# Altium PCB sumo20-hw.PcbDoc
Units mm, origin at the board's own origin, x right, y up, seen from the top; angles counter-clockwise.
Board outline 100 x 67 mm, 2 copper layers (Top Layer, Bottom Layer); 58 components, 39 nets, 243 pads, 1140 vias.
Unrouted connection lines stored in the file: 27.
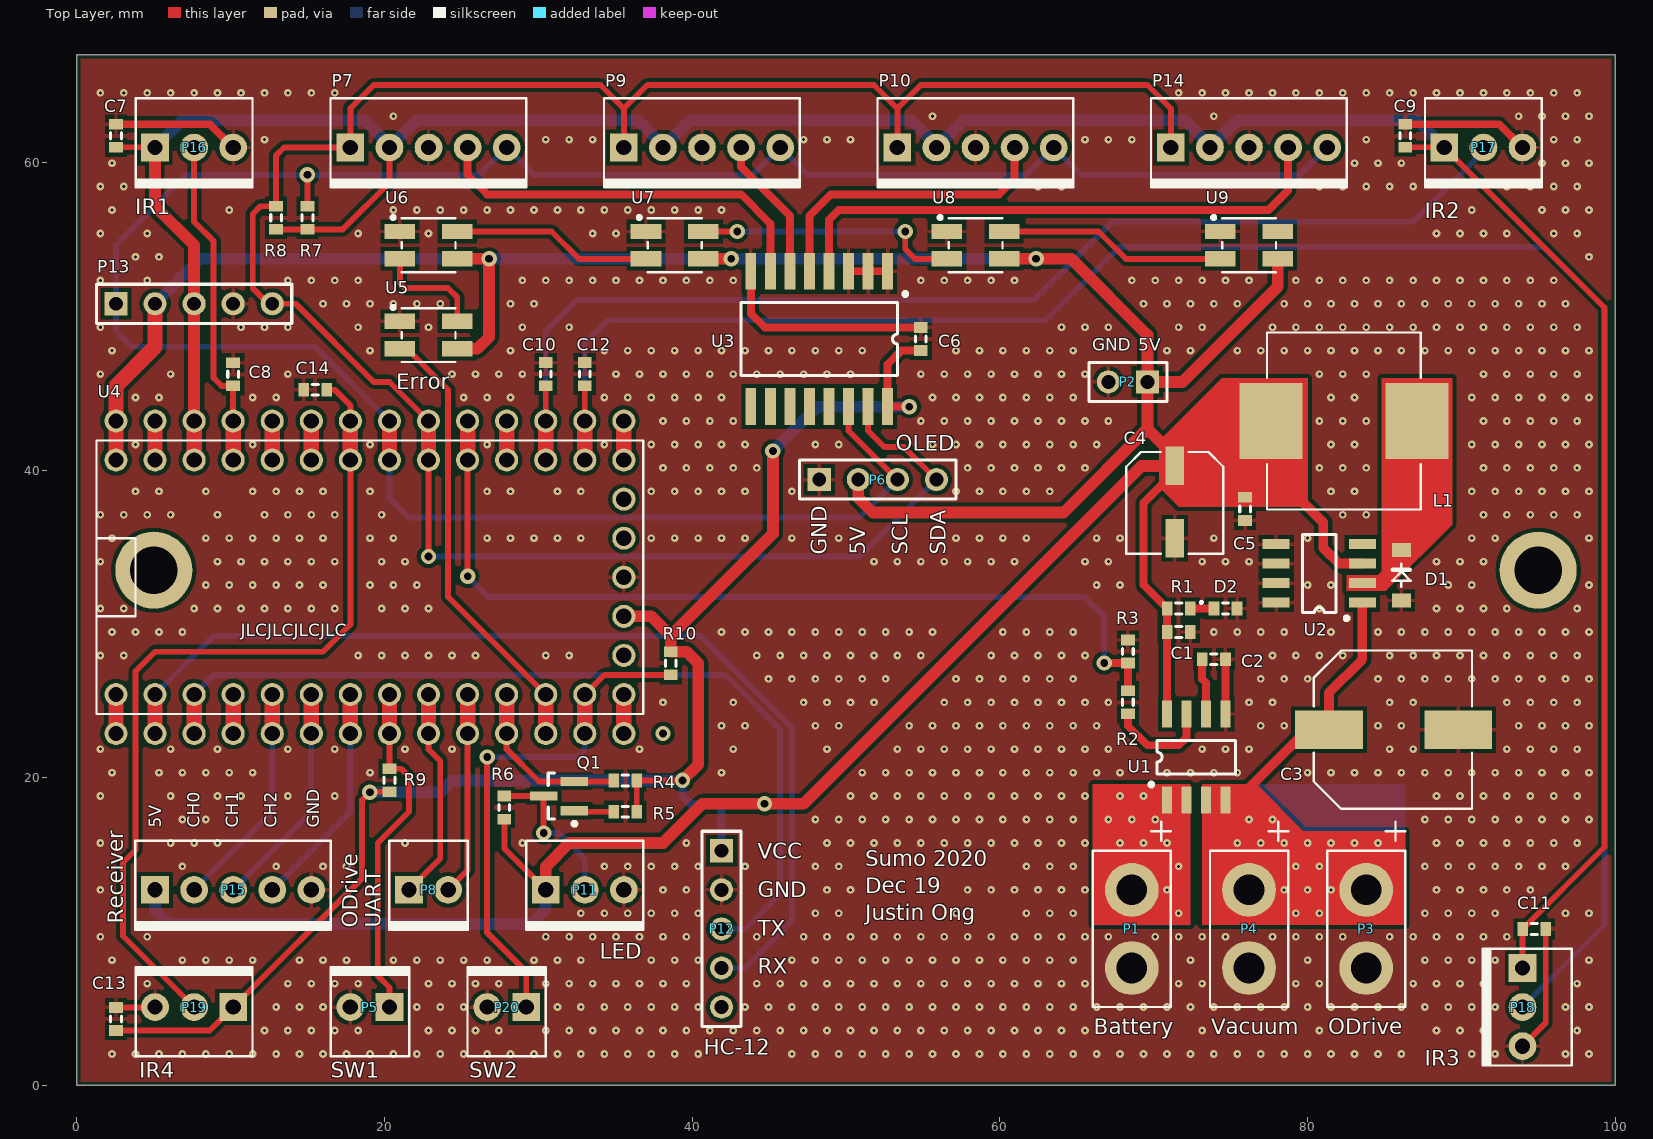
[diagram p0: Top Layer view]
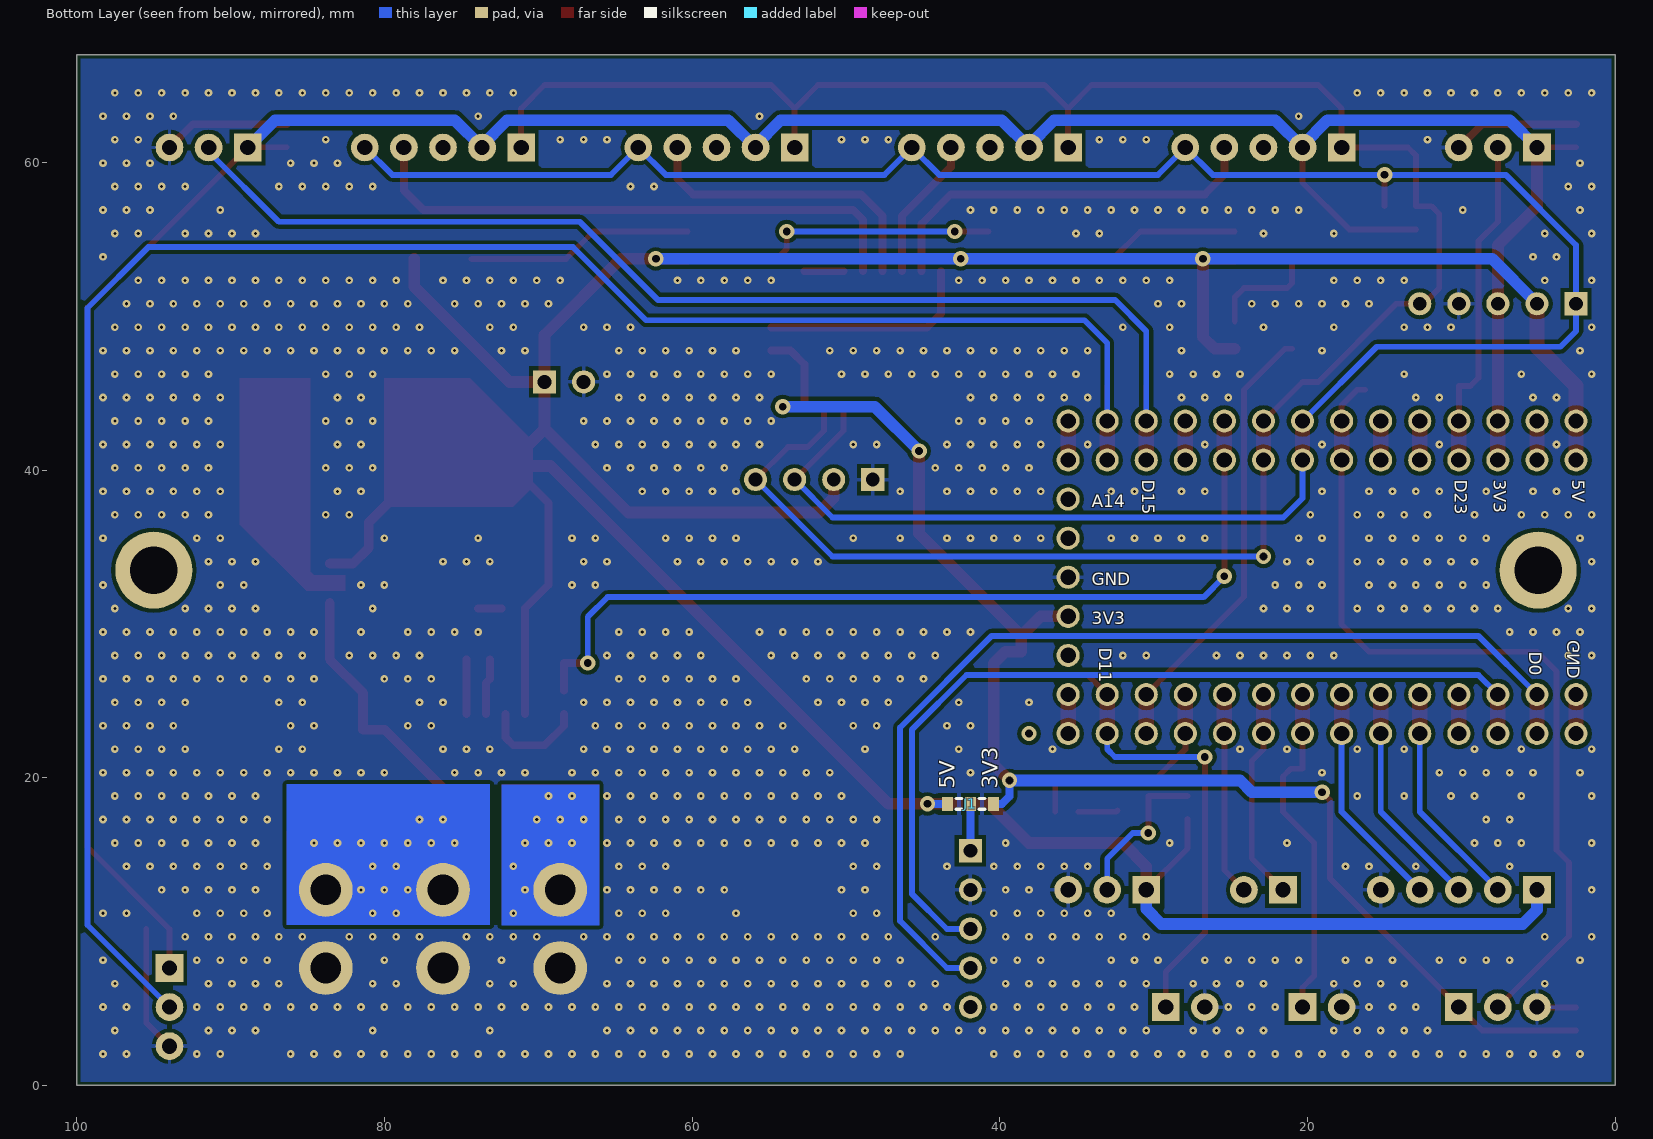
[diagram p1: Bottom Layer view, seen from below]

## Layer stack, top to bottom
Top Solder: solder mask 0.0102, Solder Resist, Dk 3.5
Top Layer: signal copper 0.0356
Dielectric 1: dielectric 0.32, FR-4, Dk 4.8
Bottom Layer: signal copper 0.0356
Bottom Solder: solder mask 0.0102, Solder Resist, Dk 3.5

## Board outline
0,0 100,0 100,67 0,67

## Design rules (kind name [scope] priority, off if disabled: settings)
Clearance "Stitching GND" [IsStitchingVia and InNet('GND') vs (IsVia and (Not IsStitchingVia)) Or IsPad] p1: gap=0.254 ignorepadtopadclearanceinfootprint=FALSE
Clearance [All] p2: gap=0.254 ignorepadtopadclearanceinfootprint=FALSE except(0: Arc-Hole Track-Hole SMDPad-Hole THPad-Hole Via-Hole Fill-Hole Poly-Hole Region-Hole Text-Hole)
PolygonConnect PolygonConnect_1 [IsStitchingVia OR HasFootprint('Wire Terminals')] p1: connectstyle=Direct reliefconductorwidth=0.254 reliefentries=4 polygonreliefangle="90 Angle" airgapwidth=0.254
PolygonConnect [All] p2: connectstyle=Relief reliefconductorwidth=0.254 reliefentries=4 polygonreliefangle="90 Angle" airgapwidth=0.254
RoutingVias [All] p1: holewidth=0.5 width=1 viastyle="Through Hole" minholewidth=0.2 minwidth=0.45 maxholewidth=0.711 maxwidth=1.27
ShortCircuit ShortCircuit_1 [Not InAnyNet vs Not InAnyNet] p1: allowed=TRUE
ShortCircuit [All] p2: allowed=FALSE
SolderMaskExpansion [All] p1: expansion=0.102
Width [All] p1: maxlimit=5 minlimit=0.254 preferedwidth=0.381
29 further rules are at their usual default settings.

## Components (designator, comment, footprint, x,y, rotation, side; value= is the part's Value field where it differs from the comment)
C1 "Cap" J1-0603 71.628,29.484 r180 top value=100nF
C2 "Cap" J1-0603 73.914,27.706 r0 top value=1nF
C3 "Cap Pol1" 10x10.5 85.598,23.134 r0 top value=470uF
C4 "Cap Pol1" 6.3X5.4 71.374,40.279 r270 top value=220uF
C5 "Cap" J1-0603 75.946,37.485 r90 top value=100nF
C6 "Cap" J1-0603 54.864,48.534 r270 top value=100nF
C7 "Cap" J1-0603 2.54,61.742 r90 top value=100nF
C8 "Cap" J1-0603 10.16,46.236 r90 top value=100nF
C9 "Cap" J1-0603 86.36,61.742 r90 top value=100nF
C10 "Cap" J1-0603 30.48,46.248 r90 top value=100nF
C11 "Cap" J1-0603 94.742,10.18 r0 top value=100nF
C12 "Cap" J1-0603 33.02,46.248 r90 top value=100nF
C13 "Cap" J1-0603 2.54,4.326 r90 top value=100nF
C14 "Cap" J1-0603 15.494,45.232 r180 top value=100nF
D1 "DSK34" SOD-123FL 86.106,33.167 r90 top
D2 "LED" "J1-0603 LED" 74.676,31.008 r0 top
J1 "Select" 0603-Jumper 41.91,18.308 r0 bottom
L1 "MS1040-680M" MS1040 82.372,43.2 r180 top value=68uH
P1 "Battery" "Wire Terminals" 68.58,12.72 r270 top
P2 "5V" HDR1X2 69.596,45.74 r180 top
P3 "ODrive" "Wire Terminals" 83.82,12.72 r270 top
P4 "Vacuum" "Wire Terminals" 76.2,12.72 r270 top
P5 "SW1" 2541P02 19.05,5.1 r0 top
P6 "OLED Display" HDR1X4 48.26,39.39 r0 top
P7 "GY-530_A" 2541P05 22.86,60.98 r180 top
P8 "ODrive" 2541P02 22.86,12.72 r180 top
P9 "GY-530_B" 2541P05 40.64,60.98 r180 top
P10 "GY-530_C" 2541P05 58.42,60.98 r180 top
P11 "WS2812" 2541P03 33.02,12.72 r180 top
P12 "HC-12" HDR1X5 41.91,15.26 r270 top
P13 "I2C" HDR1X5 2.54,50.82 r0 top
P14 "GY-530_D" 2541P05 76.2,60.98 r180 top
P15 "Receiver" 2541P05 10.16,12.72 r180 top
P16 "IR_A" 2541P03 7.62,60.98 r180 top
P17 "IR_B" 2541P03 91.44,60.98 r180 top
P18 "IR_C" 2541P03 93.98,5.1 r90 top
P19 "IR_D" 2541P03 7.62,5.1 r0 top
P20 "SW2" 2541P02 27.94,5.1 r0 top
Q1 "S8050" SOT23-3M 31.344,18.816 r180 top
R1 "Res1" J1-0603 71.628,31.008 r180 top value=1k
R2 "Resistor" J1-0603 68.326,24.912 r90 top value=10k
R3 "Resistor" J1-0603 68.326,28.214 r270 top value=20k
R4 "Resistor" J1-0603 35.65,19.832 r0 top value=10k
R5 "Resistor" J1-0603 35.65,17.8 r0 top value=10k
R6 "Resistor" J1-0603 27.788,18.066 r270 top value=10k
R7 "Resistor" J1-0603 14.986,56.408 r90 top value=4k7
R8 "Resistor" J1-0603 12.954,56.408 r90 top value=4k7
R9 "Resistor" J1-0603 20.32,19.844 r270 top value=10k
R10 "Resistor" J1-0603 38.608,27.452 r90 top value=10k
U1 "ACS712" SOP8 70.866,18.55 r90 top
U2 "XL1509" SOP8 83.566,31.389 r180 top
U3 "PCF8574T" "SOT162-1 (SO16)" 48.26,48.534 r270 top
U4 "Teensy 3.2" "Teensy 3.2" 19.05,33.04 r90 top
U5 "WS2812" WS2812B-Mini 22.86,48.788 r180 top
U6 "WS2812" WS2812B-Mini 22.86,54.63 r180 top
U7 "WS2812" WS2812B-Mini 38.862,54.63 r180 top
U8 "WS2812" WS2812B-Mini 58.42,54.63 r180 top
U9 "WS2812" WS2812B-Mini 76.2,54.63 r180 top

## Footprints (in the part's own frame and the unit in brackets; to place one, negate y for a bottom-side part, rotate by r counter-clockwise, add the part's x,y. Pads: shape width x height; smd on the part's side, far side on the other; paste and mask are expansions set on the pad)
6.3X5.4 [mm] "SMD Aluminium Electrolytic Capacitor"
  rect 2.5x1.2 smd: 1(0,0) 2(4.7,0)
  silkscreen extent -0.9,-3.15 5.7,3.15
10x10.5 [mm] "SMD Aluminium Electrolytic Capacitor"
  rect 4.4x2.5 smd: 1(-4.2,0) 2(4.2,0)
  silkscreen extent -5.2,-5.15 5.1,5.15, body extent -5.28,-5.23 5.18,5.23, height 10.2
0603-Jumper [mm] "Selectable Jumper 0603"
  rect 0.7x0.9 smd: 1(-1.5,0) 2(0,0) 3(1.5,0)
  silkscreen extent -0.95,-0.35 0.95,0.35, body extent -1.6,-0.48 1.63,0.48, height 0.9
2541P02 [mm]
  rect 1.8x1.8 hole 1: 1(1.27,0)
  round 1.8 hole 1: 2(-1.27,0)
  silkscreen extent -2.55,-3.2 2.55,2.6
2541P03 [mm]
  rect 1.8x1.8 hole 1: 1(2.54,0)
  round 1.8 hole 1: 2(0,0) 3(-2.54,0)
  silkscreen extent -3.8,-3.2 3.8,2.6
2541P05 [mm]
  rect 1.8x1.8 hole 1: 1(5.08,0)
  round 1.8 hole 1: 2(2.54,0) 3(0,0) 4(-2.54,0) 5(-5.08,0)
  silkscreen extent -6.35,-3.2 6.37,2.6
HDR1X2 [mm] "Connector; Header; 2 Position"
  rect 1.5x1.5 hole 0.9: 1(0,0)
  round 1.5 hole 0.9: 2(2.54,0)
  silkscreen extent -1.27,-1.27 3.81,1.27
HDR1X4 [mm] "Connector; Header; 4 Position"
  rect 1.5x1.5 hole 0.9: 1(0,0)
  round 1.5 hole 0.9: 2(2.54,0) 3(5.08,0) 4(7.62,0)
  silkscreen extent -1.27,-1.27 8.89,1.27
HDR1X5 [mm] "Connector; Header; 5 Position"
  rect 1.5x1.5 hole 0.9: 1(0,0)
  round 1.5 hole 0.9: 2(2.54,0) 3(5.08,0) 4(7.62,0) 5(10.16,0)
  silkscreen extent -1.27,-1.27 11.43,1.27
J1-0603 [mm] "Chip Resistor, Body 1.6x0.8mm, IPC High Density"
  rect 0.7x0.9 smd: 1(-0.75,0) 2(0.75,0)
  silkscreen extent -0.2,-0.35 0.2,0.35, body extent -0.85,-0.48 0.85,0.48, height 0.9
"J1-0603 LED" [mm] "Chip Resistor, Body 1.6x0.8mm, IPC High Density"
  rect 0.7x0.9 smd: 1(-0.75,0) 2(0.75,0)
  silkscreen extent -1.61,-0.35 0.2,0.44, body extent -0.85,-0.48 0.85,0.48, height 0.9
MS1040 [mm] "10 x 11.5 x 4mm Inductor"
  rect 4.1x4.95 smd: 1(-4.75,0) 2(4.75,0)
  silkscreen extent -5,-5.75 5,5.75, body extent -5.08,-5.83 5.08,5.83, height 4
SOD-123FL [mil]
  rect 36x48 smd: 1(-64.5,0) 2(64.5,0)
  silkscreen extent -30,-24 30,24
SOP8 [mm] "ACS712"
  rect 1.75x0.65 smd: 1(0,0) 2(0,-1.27) 3(0,-2.54) 4(0,-3.81) 5(5.6,-3.81) 6(5.6,-2.54) 7(5.6,-1.27) 8(5.6,0)
  silkscreen extent 0.89,-4.44 3.89,1.14
SOT23-3M [mm] "SOT23, 3-Leads, Body 2.9x1.3mm, Pitch 0.95mm, Lead Span 2.5mm, IPC Low Density"
  rect 1.8x0.6 smd: 1(-1,0.95) 2(-1,-0.95) 3(1,0)
  silkscreen extent -1.13,-1.5 0.7,1.92, body extent -0.7,-1.5 0.7,1.5, height 1.1
"SOT162-1 (SO16)" [mm]
  rect 2.4x0.7 smd: 1(-4.4,4.445) 2(-4.4,3.175) 3(-4.4,1.905) 4(-4.4,0.635) 5(-4.4,-0.635) 6(-4.4,-1.905) 7(-4.4,-3.175) 8(-4.4,-4.445) 9(4.4,-4.445) 10(4.4,-3.175) 11(4.4,-1.905) 12(4.4,-0.635) 13(4.4,0.635) 14(4.4,1.905) 15(4.4,3.175) 16(4.4,4.445)
  silkscreen extent -3.05,-5.08 2.37,5.71
"Teensy 3.2" [mm]
  round 1.5 hole 1: 1(-10.16,16.51) 1(-7.62,16.51) 2(-10.16,13.97) 2(-7.62,13.97) 3(-10.16,11.43) 3(-7.62,11.43) 4(-10.16,8.89) 4(-7.62,8.89) 5(-10.16,6.35) 5(-7.62,6.35) 6(-10.16,3.81) 6(-7.62,3.81) 7(-10.16,1.27) 7(-7.62,1.27) 8(-10.16,-1.27) 8(-7.62,-1.27) 9(-10.16,-3.81) 9(-7.62,-3.81) 10(-10.16,-6.35) 10(-7.62,-6.35) 11(-10.16,-8.89) 11(-7.62,-8.89) 12(-10.16,-11.43) 12(-7.62,-11.43) 13(-10.16,-13.97) 13(-7.62,-13.97) 14(-10.16,-16.51) 14(-7.62,-16.51) 15(-5.08,-16.51) 16(-2.54,-16.51) 17(0,-16.51) 18(2.54,-16.51) 19(5.08,-16.51) 20(7.62,-16.51) 20(10.16,-16.51) 21(7.62,-13.97) 21(10.16,-13.97) 22(7.62,-11.43) 22(10.16,-11.43) 23(7.62,-8.89) 23(10.16,-8.89) 24(7.62,-6.35) 24(10.16,-6.35) 25(7.62,-3.81) 25(10.16,-3.81) 26(7.62,-1.27) 26(10.16,-1.27) 27(7.62,1.27) 27(10.16,1.27) 28(7.62,3.81) 28(10.16,3.81) 29(7.62,6.35) 29(10.16,6.35) 30(7.62,8.89) 30(10.16,8.89) 31(7.62,11.43) 31(10.16,11.43) 32(7.62,13.97) 32(10.16,13.97) 33(7.62,16.51) 33(10.16,16.51)
  Top Layer lines w1: -10.16,16.51 -7.62,16.51 ; 7.62,16.51 10.16,16.51 ; -10.16,13.97 -7.62,13.97 ; 7.62,13.97 10.16,13.97 ; -10.16,11.43 -7.62,11.43 ; 7.62,11.43 9.906,11.43 10.16,11.43 ; -10.16,8.89 -7.62,8.89 ; 7.62,8.89 10.16,8.89 ; -10.16,6.35 -7.62,6.35 ; 7.62,6.35 10.16,6.35 ; -10.16,3.81 -7.62,3.81 ; 7.62,3.81 10.16,3.81 ; -10.16,1.27 -7.62,1.27 ; 7.62,1.27 10.16,1.27 ; -10.16,-1.27 -7.62,-1.27 ; 7.62,-1.27 10.16,-1.27 ; -10.16,-3.81 -7.62,-3.81 ; 7.62,-3.81 10.16,-3.81 ; -10.16,-6.35 -7.62,-6.35 ; 7.62,-6.35 10.16,-6.35 ; -10.16,-8.89 -7.62,-8.89 ; 7.62,-8.89 10.16,-8.89 ; -10.16,-11.43 -7.62,-11.43 ; 7.62,-11.43 10.16,-11.43 ; -10.16,-13.97 -7.62,-13.97 ; 7.62,-13.97 10.16,-13.97 ; -10.16,-16.51 -7.62,-16.51 ; 7.62,-16.51 10.16,-16.51
  silkscreen extent -8.89,-17.78 8.89,17.78
"Wire Terminals" [mm]
  round 3.5 hole 2: 1(0,0) 2(5.08,0)
  silkscreen extent -4.44,-2.54 7.62,2.54
WS2812B-Mini [mm] "3535 Mini Variant"
  rect 2x1 smd: 1(-1.865,0.89) 2(-1.865,-0.89) 3(1.865,-0.89) 4(1.865,0.89)
  silkscreen extent -1.75,-1.9 2.4,1.75

## Part data
C1 C5 C6 C7 C8 C9 C10 C11 C12 C13 C14: "Capacitor", LCSC=C153795, LatestRevisionDate=17-Jul-2002, LatestRevisionNote="Re-released for DXP Platform.", PackageDescription="Radial Cap, Thru-Hole; 2 Leads; 0.3 in Pin Spacing", PackageReference=RAD-0.3, Published=8-Jun-2000, Publisher="Altium Limited"
C2: "Capacitor"
C3: "Polarized Capacitor (Radial)", LCSC=C280413, LatestRevisionDate=17-Jul-2002, LatestRevisionNote="Re-released for DXP Platform.", PackageDescription="Polarized Capacitor (Radial); 2 Leads", PackageReference=RB7.6-15, Published=8-Jun-2000, Publisher="Altium Limited"
C4: "Polarized Capacitor (Radial)", LCSC=C131157, LatestRevisionDate=17-Jul-2002, LatestRevisionNote="Re-released for DXP Platform.", PackageDescription="Polarized Capacitor (Radial); 2 Leads", PackageReference=RB7.6-15, Published=8-Jun-2000, Publisher="Altium Limited"
D1: library part "D Schottky", "Schottky Diode", LCSC=C41029, Code_JEDEC=DO-214-AA, LatestRevisionDate=17-Jul-2002, LatestRevisionNote="Re-released for DXP Platform.", PackageDescription="DO-214-AA/SMB; 2 C-Bend Leads; Body 5.3 x 3.6 mm, inc. leads (LxW)", PackageReference=SMB, Published=8-Jun-2000, Publisher="Altium Limited"
D2: LCSC=C205450, LatestRevisionDate=17-Jul-2002, LatestRevisionNote="Re-released for DXP Platform.", PackageDescription="SM LED; 2 Flat Leads", PackageReference=3.2X1.6X1.1, PackageVersion=Feb-2002, Published=8-Jun-2000, Publisher="Altium Limited"
J1: library part "Select Jumper"
L1: library part Inductor, "Inductor", LCSC=C380058, Code_IEC=1005, Code_JEITA=0402, LatestRevisionDate=29-May-2009, LatestRevisionNote="IPC-7351 Footprint Added.", PackageDescription="Chip Inductor", PackageReference=0402-A, Published=8-Jun-2000, Publisher="Altium Limited"
P1 P2 P3 P4 P5 P8 P20: library part "Header 2", "Header, 2-Pin", LatestRevisionDate=17-Jul-2002, LatestRevisionNote="Re-released for DXP Platform.", Publisher="Altium Limited"
P6: library part "Header 4", "Header, 4-Pin", LatestRevisionDate=17-Jul-2002, LatestRevisionNote="Re-released for DXP Platform.", Publisher="Altium Limited"
P7 P9 P10 P12 P13 P14 P15: library part "Header 5", "Header, 5-Pin", LatestRevisionDate=17-Jul-2002, LatestRevisionNote="Re-released for DXP Platform.", Publisher="Altium Limited"
P11 P16 P17 P18 P19: library part "Header 3", "Header, 3-Pin", LatestRevisionDate=17-Jul-2002, LatestRevisionNote="Re-released for DXP Platform.", Publisher="Altium Limited"
Q1: "NPN General Purpose Amplifier", DatasheetVersion=1997, LatestRevisionDate=15-Jan-2003, LatestRevisionNote="PCB Footprint 'BCY-W3/D4.7' replaced", PackageDescription="TO, Flat Index; 3 In-Line, Axial Leads; Body Dia. 4.5mm; Leads 0.51 x 0.48 mm (max)", PackageReference=TO-92A, PackageVersion=Sep-1998, Published=8-Jun-2000, Publisher="Altium Limited"
R1: "Resistor", LatestRevisionDate=17-Jul-2002, LatestRevisionNote="Re-released for DXP Platform.", PackageDescription="Axial Device, Thru-Hole; 2 Leads; 0.3 in Pin Spacing", PackageReference=AXIAL-0.3, Published=8-Jun-2000, Publisher="Altium Limited"
U1: "Fully Integrated, Hall Effect-Based Linear Current Sensor with 2.1 kVRMS Voltage Isolation and a Low-Resistance Current Conductor"
U2: LCSC=C61063
U3: "Remote 8-Bit I/O Expander for I2C Bus"
R2 R3 R4 R5 R6 R7 R8 R9 R10: LatestRevisionDate=17-Jul-2002, LatestRevisionNote="Re-released for DXP Platform.", PackageDescription="Axial Device, Thru-Hole; 2 Leads; 0.3 in Pin Spacing", PackageReference=AXIAL-0.3, Published=8-Jun-2000, Publisher="Altium Limited"

## Free pads (board coordinates)
  round 5 hole 3.1: 1(5,33.5) 2(95,33.5)

## Via types
v1: diameter 0.5, hole 0.2, Top Layer to Bottom Layer, tented both sides, 1123 vias
v2: diameter 1, hole 0.5, Top Layer to Bottom Layer, tented both sides, 17 vias

## Nets (pads, with @x,y where several pads share a name; then routed paths per layer and width w, separated by ;. In a path a pad name is that pad's centre, name@x,y a point inside that pad or via, vN(x,y) a via of type N, cw(c..) or ccw(c..) an arc to the next point about the centre after c; other vN are vias at no path point)
3V3: C6.2 C7.1 C9.1 C11.1 C13.1 J1.1 P7.2 P9.2 P10.2 P13.3 P14.2 P16.1 P17.1 P18.1 P19.1 R4.2 R5.2 R7.1 R8.1 R9.2 R10.2 U3.16 U4.16 U4.31 | length 287.6
  Top Layer w0.381: C13.1 8.636,3.576 P19.1 18.542,13.482 18.542,18.562 v2(19.05,19.07) 19.074,19.094 R9.2 ; C7.1 5.068,60.992 P16.1 ; U4.31@7.62,42.946 U4.31@7.62,43.2 ; R8.1 R7.1 17.284,55.658 20.32,58.694 P7.2 ; R5.2 R4.2 v2(39.37,19.832) ; C9.1 88.888,60.992 P17.1 99.314,50.566 99.314,15.502 C11.1 93.98,10.168 P18.1
  Top Layer w0.508: v2(54.116,44.134) U3.16 52.705,46.883 53.606,47.784 C6.2
  Top Layer w0.762: P16.1 5.08,57.17 7.62,54.63 P13.3 ; U4.31@7.62,43.2 P13.3@7.62,50.566 ; U4.16 37.338,30.5 38.608,29.23 ; v2(39.37,19.832) 40.386,20.848 40.386,27.452 39.636,28.202 R10.2 38.608,29.23 ; v2(45.25,41.25) 45.25,35.872 38.608,29.23
  Bottom Layer w0.508: v2(39.37,19.832) 39.37,18.796 39.858,18.308 J1.1
  Bottom Layer w0.762: P16.1 6.858,62.758 18.7,62.758 20.32,61.138 P7.2 22.098,62.758 36.48,62.758 38.1,61.138 P9.2 39.878,62.758 54.26,62.758 55.88,61.138 P10.2 57.658,62.758 72.04,62.758 73.66,61.138 P14.2 75.438,62.758 87.122,62.758 P17.1 ; v2(19.05,19.07) 23.622,19.07 24.384,19.832 v2(39.37,19.832) ; v2(45.25,41.25) 48.134,44.134 v2(54.116,44.134)
5V: C1.2 C4.1 C5.2 J1.3 L1.2 P2.1 P6.2 P11.1 P13.2 P15.1 R1.2 R6.2 U1.8 U2.3 U4.33 U5.1 U6.1 U7.1 U8.1 U9.1 | length 253.3
  Top Layer w0.381: R6.2 27.788,15.412 P11.1
  Top Layer w0.508: 70.612,39.136 69.342,37.866 69.342,32.544 70.866,31.02 U1.8
  Top Layer w0.635: L1.2@77.546,43.073 77.546,40.076 81.026,36.596 81.026,34.945 82.042,33.929 U2.3
  Top Layer w0.762: U5.1 26.034,47.898 26.796,48.66 v2(26.796,53.74) U6.1 ; P11.1 30.48,14.23 32.018,15.768 38.12,15.768 40.66,18.308 v2(44.704,18.308) 47.244,18.308 69.215,40.279 C4.1 ; U7.1 v2(42.546,53.74) ; P6.2 50.8,38.2 51.75,37.25 64.154,37.25 69.596,42.692 ; U8.1 v2(62.358,53.74) 64.644,53.74 69.596,48.788 P2.1 ; C4.1@71.374,39.136 C4.1 ; U9.1 78.065,51.923 71.882,45.74 P2.1 ; 69.596,42.692 71.374,40.914 C4.1 ; 69.596,42.692 P2.1
  Top Layer w1: U4.33@2.54,43.2 2.54,45.486 5.08,48.026 P13.2
  Bottom Layer w0.508: J1.3 v2(44.704,18.308)
  Bottom Layer w0.762: P15.1 5.08,11.42 6,10.5 29.5,10.5 30.48,11.48 P11.1 ; P13.2 8,53.74 v2(26.796,53.74) v2(42.546,53.74) v2(62.358,53.74)
GND: C1.1 C2.2 C3.2 C4.2 C5.1 C6.1 C7.2 C8.2 C9.2 C10.2 C11.2 C12.2 C13.2 C14.2 D1.1 D2.2 P1.2 P2.2 P3.2 P4.2 P5.2 P6.1 P7.3 P9.3 P10.3 P11.3 P12.2 P13.4 P14.3 P15.5 P16.3 P17.3 P18.3 P19.3 P20.2 R3.1 U1.5 U2.5 U2.6 U2.7 U2.8 U3.1 U3.2 U3.3 U3.8 U4.17 U5.3 U6.3 U7.3 U8.3 U9.3 | length 47.6
  Top Layer w0.381: C13.2 5.056,5.076 P19.3 ; P18.3 95.492,4.072 C11.2
  Top Layer w0.508: C7.2 8.648,62.492 P16.3 ; U3.8 43.815,50.185 44.716,49.284 C6.1 ; U3.3 U3.2 U3.1 ; C2.2 74.664,24.162 U1.5 ; C9.2 92.468,62.492 P17.3
  other v1: 2.286,2.052 3.81,2.052 5.334,2.052 6.858,2.052 8.382,2.052 9.906,2.052 11.43,2.052 12.954,2.052 14.478,2.052 16.002,2.052 17.526,2.052 19.05,2.052 20.574,2.052 22.098,2.052 23.622,2.052 25.146,2.052 26.67,2.052 28.194,2.052 29.718,2.052 31.242,2.052 32.766,2.052 34.29,2.052 35.814,2.052 37.338,2.052 38.862,2.052 40.386,2.052 46.482,2.052 48.006,2.052 49.53,2.052 51.054,2.052 52.578,2.052 54.102,2.052 55.626,2.052 57.15,2.052 58.674,2.052 60.198,2.052 61.722,2.052 63.246,2.052 64.77,2.052 66.294,2.052 67.818,2.052 69.342,2.052 70.866,2.052 72.39,2.052 73.914,2.052 75.438,2.052 76.962,2.052 78.486,2.052 80.01,2.052 81.534,2.052 83.058,2.052 84.582,2.052 86.106,2.052 90.678,2.052 92.202,2.052 96.774,2.052 98.298,2.052 12.192,3.576 13.716,3.576 15.24,3.576 16.764,3.576 18.288,3.576 22.86,3.576 24.384,3.576 25.908,3.576 27.432,3.576 30.48,3.576 32.004,3.576 33.528,3.576 35.052,3.576 36.576,3.576 38.1,3.576 39.624,3.576 41.148,3.576 42.672,3.576 44.196,3.576 45.72,3.576 47.244,3.576 48.768,3.576 50.292,3.576 51.816,3.576 53.34,3.576 54.864,3.576 56.388,3.576 57.912,3.576 59.436,3.576 60.96,3.576 62.484,3.576 64.008,3.576 65.532,3.576 73.152,3.576 80.772,3.576 88.392,3.576 89.916,3.576 91.44,3.576 97.536,3.576 12.954,5.1 14.478,5.1 16.002,5.1 22.098,5.1 23.622,5.1 25.146,5.1 31.242,5.1 32.766,5.1 34.29,5.1 35.814,5.1 37.338,5.1 38.862,5.1 40.386,5.1 43.434,5.1 44.958,5.1 46.482,5.1 48.006,5.1 49.53,5.1 51.054,5.1 52.578,5.1 54.102,5.1 55.626,5.1 57.15,5.1 58.674,5.1 60.198,5.1 61.722,5.1 63.246,5.1 64.77,5.1 66.294,5.1 67.818,5.1 69.342,5.1 70.866,5.1 72.39,5.1 73.914,5.1 75.438,5.1 76.962,5.1 78.486,5.1 80.01,5.1 81.534,5.1 83.058,5.1 84.582,5.1 86.106,5.1 87.63,5.1 89.154,5.1 90.678,5.1 92.202,5.1 96.774,5.1 98.298,5.1 4.572,6.624 13.716,6.624 15.24,6.624 16.764,6.624 18.288,6.624 22.86,6.624 24.384,6.624 25.908,6.624 27.432,6.624 30.48,6.624 32.004,6.624 33.528,6.624 35.052,6.624 36.576,6.624 38.1,6.624 39.624,6.624 44.196,6.624 45.72,6.624 47.244,6.624 48.768,6.624 50.292,6.624 51.816,6.624 53.34,6.624 54.864,6.624 56.388,6.624 57.912,6.624 59.436,6.624 60.96,6.624 62.484,6.624 64.008,6.624 65.532,6.624 71.628,6.624 73.152,6.624 79.248,6.624 80.772,6.624 86.868,6.624 88.392,6.624 89.916,6.624 91.44,6.624 97.536,6.624 2.286,8.148 6.858,8.148 8.382,8.148 9.906,8.148 11.43,8.148 14.478,8.148 16.002,8.148 17.526,8.148 20.574,8.148 22.098,8.148 23.622,8.148 25.146,8.148 26.67,8.148 29.718,8.148 31.242,8.148 32.766,8.148 37.338,8.148 38.862,8.148 40.386,8.148 46.482,8.148 48.006,8.148 49.53,8.148 51.054,8.148 52.578,8.148 54.102,8.148 55.626,8.148 57.15,8.148 58.674,8.148 60.198,8.148 61.722,8.148 63.246,8.148 64.77,8.148 72.39,8.148 80.01,8.148 87.63,8.148 89.154,8.148 90.678,8.148 92.202,8.148 98.298,8.148 1.524,9.672 4.572,9.672 30.48,9.672 32.004,9.672 33.528,9.672 35.052,9.672 36.576,9.672 38.1,9.672 39.624,9.672 44.196,9.672 47.244,9.672 48.768,9.672 50.292,9.672 51.816,9.672 53.34,9.672 54.864,9.672 56.388,9.672 57.912,9.672 59.436,9.672 60.96,9.672 62.484,9.672 64.008,9.672 65.532,9.672 67.056,9.672 70.104,9.672 71.628,9.672 73.152,9.672 74.676,9.672 77.724,9.672 79.248,9.672 80.772,9.672 82.296,9.672 85.344,9.672 86.868,9.672 88.392,9.672 89.916,9.672 91.44,9.672 92.964,9.672 32.766,11.196 34.29,11.196 35.814,11.196 37.338,11.196 38.862,11.196 40.386,11.196 48.006,11.196 49.53,11.196 57.15,11.196 61.722,11.196 63.246,11.196 64.77,11.196 87.63,11.196 89.154,11.196 90.678,11.196 92.202,11.196 96.774,11.196 98.298,11.196 1.524,12.72 38.1,12.72 39.624,12.72 48.768,12.72 50.292,12.72 57.912,12.72 59.436,12.72 60.96,12.72 62.484,12.72 64.008,12.72 65.532,12.72 88.392,12.72 89.916,12.72 91.44,12.72 92.964,12.72 94.488,12.72 6.858,14.244 12.954,14.244 16.002,14.244 17.526,14.244 34.29,14.244 35.814,14.244 37.338,14.244 38.862,14.244 40.386,14.244 43.434,14.244 48.006,14.244 49.53,14.244 61.722,14.244 63.246,14.244 64.77,14.244 87.63,14.244 89.154,14.244 90.678,14.244 92.202,14.244 93.726,14.244 95.25,14.244 96.774,14.244 1.524,15.768 6.096,15.768 7.62,15.768 9.144,15.768 21.336,15.768 28.956,15.768 39.624,15.768 48.768,15.768 50.292,15.768 51.816,15.768 53.34,15.768 54.864,15.768 56.388,15.768 57.912,15.768 59.436,15.768 60.96,15.768 62.484,15.768 64.008,15.768 65.532,15.768 88.392,15.768 89.916,15.768 91.44,15.768 92.964,15.768 94.488,15.768 96.012,15.768 97.536,15.768 6.858,17.292 8.382,17.292 48.006,17.292 49.53,17.292 51.054,17.292 52.578,17.292 54.102,17.292 55.626,17.292 57.15,17.292 58.674,17.292 60.198,17.292 61.722,17.292 63.246,17.292 64.77,17.292 87.63,17.292 89.154,17.292 90.678,17.292 92.202,17.292 93.726,17.292 95.25,17.292 96.774,17.292 98.298,17.292 1.524,18.816 6.096,18.816 9.144,18.816 10.668,18.816 13.716,18.816 16.764,18.816 50.292,18.816 51.816,18.816 53.34,18.816 54.864,18.816 56.388,18.816 57.912,18.816 59.436,18.816 60.96,18.816 62.484,18.816 64.008,18.816 65.532,18.816 88.392,18.816 89.916,18.816 91.44,18.816 92.964,18.816 94.488,18.816 96.012,18.816 97.536,18.816 2.286,20.34 5.334,20.34 6.858,20.34 8.382,20.34 9.906,20.34 11.43,20.34 19.05,20.34 41.91,20.34 51.054,20.34 52.578,20.34 54.102,20.34 55.626,20.34 57.15,20.34 58.674,20.34 60.198,20.34 61.722,20.34 63.246,20.34 64.77,20.34 66.294,20.34 67.818,20.34 70.866,20.34 72.39,20.34 73.914,20.34 75.438,20.34 80.01,20.34 81.534,20.34 83.058,20.34 84.582,20.34 86.106,20.34 87.63,20.34 89.154,20.34 90.678,20.34 92.202,20.34 93.726,20.34 95.25,20.34 96.774,20.34 98.298,20.34 1.524,21.864 6.096,21.864 9.144,21.864 13.716,21.864 16.764,21.864 21.336,21.864 24.384,21.864 36.576,21.864 42.672,21.864 48.768,21.864 53.34,21.864 54.864,21.864 56.388,21.864 57.912,21.864 59.436,21.864 60.96,21.864 62.484,21.864 64.008,21.864 65.532,21.864 67.056,21.864 73.152,21.864 74.676,21.864 76.2,21.864 85.344,21.864 86.868,21.864 92.964,21.864 94.488,21.864 96.012,21.864 97.536,21.864 41.91,23.388 43.434,23.388 48.006,23.388 49.53,23.388 54.102,23.388 55.626,23.388 57.15,23.388 58.674,23.388 60.198,23.388 61.722,23.388 63.246,23.388 64.77,23.388 66.294,23.388 76.962,23.388 78.486,23.388 84.582,23.388 86.106,23.388 93.726,23.388 95.25,23.388 96.774,23.388 98.298,23.388 38.1,24.912 42.672,24.912 47.244,24.912 48.768,24.912 50.292,24.912 51.816,24.912 56.388,24.912 57.912,24.912 59.436,24.912 60.96,24.912 62.484,24.912 64.008,24.912 65.532,24.912 67.056,24.912 76.2,24.912 77.724,24.912 85.344,24.912 86.868,24.912 92.964,24.912 94.488,24.912 96.012,24.912 97.536,24.912 44.958,26.436 46.482,26.436 48.006,26.436 49.53,26.436 51.054,26.436 52.578,26.436 57.15,26.436 58.674,26.436 60.198,26.436 61.722,26.436 63.246,26.436 64.77,26.436 76.962,26.436 78.486,26.436 80.01,26.436 84.582,26.436 86.106,26.436 87.63,26.436 89.154,26.436 90.678,26.436 92.202,26.436 93.726,26.436 95.25,26.436 96.774,26.436 98.298,26.436 1.524,27.96 3.048,27.96 18.288,27.96 19.812,27.96 21.336,27.96 22.86,27.96 24.384,27.96 25.908,27.96 30.48,27.96 32.004,27.96 44.196,27.96 45.72,27.96 47.244,27.96 48.768,27.96 50.292,27.96 51.816,27.96 53.34,27.96 54.864,27.96 59.436,27.96 60.96,27.96 62.484,27.96 64.008,27.96 65.532,27.96 77.724,27.96 79.248,27.96 80.772,27.96 82.296,27.96 85.344,27.96 86.868,27.96 88.392,27.96 89.916,27.96 91.44,27.96 92.964,27.96 94.488,27.96 96.012,27.96 97.536,27.96 2.286,29.484 3.81,29.484 5.334,29.484 6.858,29.484 41.91,29.484 43.434,29.484 44.958,29.484 46.482,29.484 48.006,29.484 49.53,29.484 51.054,29.484 52.578,29.484 54.102,29.484 55.626,29.484 60.198,29.484 61.722,29.484 63.246,29.484 64.77,29.484 73.914,29.484 75.438,29.484 76.962,29.484 78.486,29.484 81.534,29.484 84.582,29.484 86.106,29.484 87.63,29.484 89.154,29.484 90.678,29.484 92.202,29.484 93.726,29.484 95.25,29.484 96.774,29.484 98.298,29.484 1.524,31.008 3.048,31.008 7.62,31.008 9.144,31.008 10.668,31.008 12.192,31.008 13.716,31.008 15.24,31.008 16.764,31.008 19.812,31.008 21.336,31.008 22.86,31.008 80.772,31.008 88.392,31.008 89.916,31.008 91.44,31.008 92.964,31.008 97.536,31.008 8.382,32.532 9.906,32.532 11.43,32.532 12.954,32.532 14.478,32.532 16.002,32.532 19.05,32.532 20.574,32.532 22.098,32.532 66.294,32.532 67.818,32.532 80.01,32.532 81.534,32.532 89.154,32.532 90.678,32.532 98.298,32.532 1.524,34.056 9.144,34.056 10.668,34.056 12.192,34.056 13.716,34.056 15.24,34.056 16.764,34.056 19.812,34.056 21.336,34.056 51.816,34.056 53.34,34.056 54.864,34.056 56.388,34.056 57.912,34.056 59.436,34.056 60.96,34.056 65.532,34.056 67.056,34.056 73.152,34.056 74.676,34.056 76.2,34.056 88.392,34.056 89.916,34.056 91.44,34.056 2.286,35.58 8.382,35.58 9.906,35.58 11.43,35.58 12.954,35.58 14.478,35.58 16.002,35.58 19.05,35.58 20.574,35.58 26.67,35.58 28.194,35.58 29.718,35.58 31.242,35.58 32.766,35.58 37.338,35.58 38.862,35.58 40.386,35.58 41.91,35.58 43.434,35.58 46.482,35.58 49.53,35.58 57.15,35.58 58.674,35.58 60.198,35.58 61.722,35.58 66.294,35.58 67.818,35.58 73.914,35.58 80.01,35.58 90.678,35.58 92.202,35.58 98.298,35.58 1.524,37.104 3.048,37.104 4.572,37.104 6.096,37.104 9.144,37.104 12.192,37.104 13.716,37.104 15.24,37.104 16.764,37.104 19.812,37.104 82.296,37.104 83.82,37.104 91.44,37.104 92.964,37.104 94.488,37.104 96.012,37.104 97.536,37.104 3.81,38.628 5.334,38.628 8.382,38.628 11.43,38.628 12.954,38.628 14.478,38.628 16.002,38.628 19.05,38.628 26.67,38.628 28.194,38.628 31.242,38.628 32.766,38.628 37.338,38.628 38.862,38.628 40.386,38.628 41.91,38.628 43.434,38.628 46.482,38.628 57.15,38.628 58.674,38.628 60.198,38.628 61.722,38.628 63.246,38.628 81.534,38.628 83.058,38.628 90.678,38.628 92.202,38.628 93.726,38.628 95.25,38.628 96.774,38.628 98.298,38.628 38.1,40.152 39.624,40.152 41.148,40.152 42.672,40.152 44.196,40.152 57.912,40.152 59.436,40.152 60.96,40.152 62.484,40.152 64.008,40.152 65.532,40.152 80.772,40.152 82.296,40.152 83.82,40.152 91.44,40.152 92.964,40.152 94.488,40.152 96.012,40.152 97.536,40.152 3.81,41.676 11.43,41.676 19.05,41.676 26.67,41.676 34.29,41.676 37.338,41.676 38.862,41.676 40.386,41.676 41.91,41.676 43.434,41.676 48.006,41.676 49.53,41.676 55.626,41.676 57.15,41.676 58.674,41.676 60.198,41.676 61.722,41.676 63.246,41.676 64.77,41.676 66.294,41.676 81.534,41.676 83.058,41.676 90.678,41.676 92.202,41.676 93.726,41.676 95.25,41.676 96.774,41.676 98.298,41.676 38.1,43.2 39.624,43.2 41.148,43.2 42.672,43.2 54.864,43.2 56.388,43.2 57.912,43.2 59.436,43.2 60.96,43.2 62.484,43.2 64.008,43.2 65.532,43.2 67.056,43.2 80.772,43.2 82.296,43.2 83.82,43.2 91.44,43.2 92.964,43.2 94.488,43.2 96.012,43.2 97.536,43.2 3.81,44.724 5.334,44.724 11.43,44.724 12.954,44.724 25.146,44.724 26.67,44.724 28.194,44.724 34.29,44.724 35.814,44.724 37.338,44.724 38.862,44.724 40.386,44.724 41.91,44.724 55.626,44.724 57.15,44.724 58.674,44.724 60.198,44.724 61.722,44.724 63.246,44.724 64.77,44.724 81.534,44.724 83.058,44.724 90.678,44.724 92.202,44.724 93.726,44.724 95.25,44.724 96.774,44.724 98.298,44.724 1.524,46.248 6.096,46.248 13.716,46.248 24.384,46.248 25.908,46.248 27.432,46.248 28.956,46.248 35.052,46.248 36.576,46.248 38.1,46.248 39.624,46.248 41.148,46.248 42.672,46.248 44.196,46.248 45.72,46.248 47.244,46.248 48.768,46.248 50.292,46.248 54.864,46.248 56.388,46.248 57.912,46.248 59.436,46.248 60.96,46.248 62.484,46.248 64.008,46.248 65.532,46.248 80.772,46.248 82.296,46.248 83.82,46.248 91.44,46.248 92.964,46.248 94.488,46.248 96.012,46.248 97.536,46.248 2.286,47.772 19.05,47.772 28.194,47.772 34.29,47.772 35.814,47.772 37.338,47.772 38.862,47.772 40.386,47.772 41.91,47.772 43.434,47.772 44.958,47.772 46.482,47.772 48.006,47.772 49.53,47.772 51.054,47.772 57.15,47.772 58.674,47.772 60.198,47.772 61.722,47.772 63.246,47.772 64.77,47.772 70.866,47.772 72.39,47.772 75.438,47.772 76.962,47.772 78.486,47.772 80.01,47.772 81.534,47.772 83.058,47.772 84.582,47.772 86.106,47.772 87.63,47.772 89.154,47.772 90.678,47.772 92.202,47.772 93.726,47.772 95.25,47.772 96.774,47.772 98.298,47.772 1.524,49.296 10.668,49.296 12.192,49.296 13.716,49.296 18.288,49.296 22.86,49.296 28.956,49.296 32.004,49.296 64.008,49.296 65.532,49.296 67.056,49.296 71.628,49.296 73.152,49.296 77.724,49.296 79.248,49.296 80.772,49.296 82.296,49.296 83.82,49.296 85.344,49.296 86.868,49.296 88.392,49.296 89.916,49.296 91.44,49.296 92.964,49.296 94.488,49.296 96.012,49.296 97.536,49.296 16.002,50.82 17.526,50.82 19.05,50.82 20.574,50.82 22.098,50.82 23.622,50.82 28.194,50.82 29.718,50.82 69.342,50.82 70.866,50.82 72.39,50.82 73.914,50.82 75.438,50.82 78.486,50.82 80.01,50.82 81.534,50.82 83.058,50.82 84.582,50.82 86.106,50.82 87.63,50.82 89.154,50.82 90.678,50.82 92.202,50.82 93.726,50.82 95.25,50.82 96.774,50.82 1.524,52.344 4.572,52.344 13.716,52.344 15.24,52.344 16.764,52.344 18.288,52.344 28.956,52.344 30.48,52.344 32.004,52.344 33.528,52.344 35.052,52.344 36.576,52.344 38.1,52.344 39.624,52.344 41.148,52.344 42.672,52.344 54.864,52.344 56.388,52.344 57.912,52.344 59.436,52.344 60.96,52.344 68.58,52.344 70.104,52.344 71.628,52.344 73.152,52.344 74.676,52.344 76.2,52.344 79.248,52.344 80.772,52.344 82.296,52.344 83.82,52.344 85.344,52.344 86.868,52.344 88.392,52.344 89.916,52.344 91.44,52.344 92.964,52.344 94.488,52.344 96.012,52.344 3.81,53.868 5.334,53.868 98.298,53.868 1.524,55.392 4.572,55.392 18.288,55.392 22.86,55.392 33.528,55.392 35.052,55.392 88.392,55.392 89.916,55.392 91.44,55.392 92.964,55.392 96.012,55.392 97.536,55.392 2.286,56.916 9.906,56.916 20.574,56.916 22.098,56.916 23.622,56.916 25.146,56.916 26.67,56.916 28.194,56.916 29.718,56.916 31.242,56.916 32.766,56.916 34.29,56.916 35.814,56.916 37.338,56.916 38.862,56.916 40.386,56.916 41.91,56.916 90.678,56.916 95.25,56.916 96.774,56.916 98.298,56.916 1.524,58.44 3.048,58.44 62.484,58.44 64.008,58.44 80.772,58.44 82.296,58.44 83.82,58.44 85.344,58.44 86.868,58.44 92.964,58.44 94.488,58.44 96.012,58.44 97.536,58.44 2.286,59.964 83.058,59.964 84.582,59.964 86.106,59.964 95.25,59.964 96.774,59.964 98.298,59.964 12.192,61.488 30.48,61.488 32.004,61.488 33.528,61.488 47.244,61.488 48.768,61.488 50.292,61.488 65.532,61.488 67.056,61.488 68.58,61.488 83.82,61.488 96.012,61.488 97.536,61.488 20.574,63.012 55.626,63.012 73.914,63.012 93.726,63.012 95.25,63.012 96.774,63.012 98.298,63.012 1.524,64.536 3.048,64.536 4.572,64.536 6.096,64.536 7.62,64.536 9.144,64.536 10.668,64.536 12.192,64.536 13.716,64.536 15.24,64.536 16.764,64.536 71.628,64.536 73.152,64.536 74.676,64.536 76.2,64.536 77.724,64.536 79.248,64.536 80.772,64.536 82.296,64.536 83.82,64.536 85.344,64.536 86.868,64.536 88.392,64.536 89.916,64.536 91.44,64.536 92.964,64.536 94.488,64.536 96.012,64.536 97.536,64.536
IR1: C8.1 P16.2 U4.30 | length 19.3
  Top Layer w0.381: P16.2 7.62,56.154 8.89,54.884 8.89,45.994 9.398,45.486 C8.1 U4.30@10.16,43.2
IR2: C10.1 P17.2 U4.22 | length 74.2
  Top Layer w0.381: U4.22@30.48,43.2 C10.1
  Bottom Layer w0.381: U4.22@30.48,43.2 30.48,49.042 32.512,51.074 62.23,51.074 67.31,56.154 86.868,56.154 91.44,60.726 P17.2
IR3: C12.1 P18.2 U4.21 | length 125.5
  Top Layer w0.381: U4.21@33.02,43.2 C12.1
  Bottom Layer w0.381: U4.21@33.02,43.2 33.02,48.27 34.5,49.75 63,49.75 67.75,54.5 95.36,54.5 99.314,50.546 99.314,10.434 P18.2
IR4: C14.1 P19.2 U4.27 | length 53
  Top Layer w0.381: P19.2 3,9.72 3,14.5 3.81,15.31 3.81,26.924 5.08,28.194 16.002,28.194 17.78,29.972 U4.27@17.78,40.66 ; C14.1 16.764,45.232 17.78,44.216 U4.27@17.78,43.2
ISEN: R2.2 R3.2 U4.24 | length 56.4
  Top Layer w0.381: v2(25.4,33.1) U4.24@25.4,40.66
  Top Layer w0.508: v2@66.75,27.5 v2(66.786,27.464) R3.2 R2.2
  Bottom Layer w0.381: v2(25.4,33.1) 26.75,31.75 65.5,31.75 66.786,30.464 v2(66.786,27.464)
NetC2_1: C2.1 U1.6 | length 3.7
  Top Layer w0.508: C2.1 73.152,27.694 73.152,26.436 73.406,26.182 U1.6
NetD1_2: D1.2 L1.1 U2.2
NetD2_1: D2.1 R1.1 | length 1.5
  Top Layer w0.508: R1.1 D2.1
NetJ1_2: J1.2 P12.1 | length 3
  Bottom Layer w0.508: P12.1 J1.2
NetP11_2: P11.2 Q1.3 R6.1 | length 10.5
  Top Layer w0.381: R6.1 Q1.3 v2(30.344,16.412) v2@30.48,16.276
  Bottom Layer w0.381: v2(30.344,16.412) 31.36,16.412 33.02,14.752 P11.2
NetQ1_1: Q1.1 R5.1 | length 2.6
  Top Layer w0.381: Q1.1 32.41,17.8 R5.1
NetR2_1: R2.1 U1.7 | length 6.8
  Top Layer w0.508: R2.1 68.326,23.388 69.596,22.118 71.628,22.118 72.136,22.626 U1.7
NetU5_2: U5.2 U6.4 | length 7.2
  Top Layer w0.381: U6.4 20.995,52.177 21.336,51.836 24.13,51.836 24.725,51.241 U5.2
NetU6_2: U6.2 U7.4 | length 13
  Top Layer w0.381: U6.2 30.86,55.52 32.64,53.74 U7.4
NetU7_2: U7.2 U8.4 | length 17.2
  Top Layer w0.381: U7.2 v2(42.926,55.52) ; v2(53.848,55.52) 53.848,54.376 54.484,53.74 U8.4
  Bottom Layer w0.381: v2(42.926,55.52) v2(53.848,55.52)
NetU8_2: U8.2 U9.4 | length 14.8
  Top Layer w0.381: U8.2 66.42,55.52 68.2,53.74 U9.4
RECEIVER_CH0: P15.2 U4.5 | length 12.3
  Bottom Layer w0.381: P15.2 12.7,17.8 U4.5@12.7,22.88
RECEIVER_CH1: P15.3 U4.6 | length 12.3
  Bottom Layer w0.381: P15.3 15.24,17.8 U4.6@15.24,22.88
RECEIVER_CH2: P15.4 U4.7 | length 12.3
  Bottom Layer w0.381: P15.4 17.78,17.8 U4.7@17.78,22.88
RX1: P12.4 U4.2 | length 63.9
  Bottom Layer w0.381: U4.2@5.08,25.42 8.89,29.23 40.522,29.23 46.482,23.27 46.482,10.688 43.434,7.64 P12.4
RX3: P8.1 U4.9 | length 11.3
  Top Layer w0.381: P8.1 23.622,14.752 23.622,21.102 22.86,21.864 U4.9@22.86,22.88
SCL: P6.3 P7.5 P9.5 P10.5 P13.1 P14.5 R7.2 U3.14 U4.26 | length 156.7
  Top Layer w0.381: R7.2 v2(14.986,59.202) ; U3.14 50.165,42.565 P6.3
  Bottom Layer w0.381: U4.26@20.32,40.66 20.32,38.18 21.575,36.925 50.875,36.925 P6.3 ; U4.26@20.32,43.2 15.494,48.026 3.556,48.026 2.54,49.042 P13.1 2.54,54.63 7.112,59.202 v2(14.986,59.202) 26.162,59.202 P7.5 29.718,59.202 43.942,59.202 P9.5 47.498,59.202 61.722,59.202 P10.5 65.278,59.202 79.502,59.202 P14.5
SDA: P6.4 P7.1 P9.1 P10.1 P13.5 P14.1 R8.2 U3.15 U4.25 | length 146.2
  Top Layer w0.381: U4.25@22.86,40.66 v2(22.86,34.39) v2@23,34.25 ; U4.25@22.86,43.2 20.32,45.74 19.304,45.74 14.224,50.82 P13.5 12.446,50.82 11.43,51.836 11.43,56.662 11.926,57.158 R8.2 12.954,60.472 13.462,60.98 P7.1 17.78,63.52 19.304,65.044 34.036,65.044 35.56,63.52 ; P9.1 35.56,63.52 ; U3.15 51.435,42.565 52.5,41.5 53.77,41.5 P6.4 ; P10.1 53.34,63.52 ; P14.1 71.12,63.52 69.596,65.044 54.864,65.044 53.34,63.52 ; 35.56,63.52 37.084,65.044 51.816,65.044 53.34,63.52
  Bottom Layer w0.381: v2@22.75,34.385 50.875,34.385 P6.4
SW1: P5.1 R9.1 U4.8 | length 19.9
  Top Layer w0.381: P5.1 20.32,6.37 19.558,7.132 19.558,15.768 21.59,17.8 21.59,20.086 21.082,20.594 R9.1@20.332,20.594 ; R9.1 R9.1@20.332,20.594 ; U4.8@20.32,22.88 20.332,22.868 R9.1@20.332,20.594
SW2: P20.1 R10.1 U4.13 | length 31
  Top Layer w0.381: v2(26.67,21.356) 26.67,9.926 29.21,7.386 P20.1 ; U4.13@33.02,25.42 34.29,26.69 R10.1@38.608,26.69
  Bottom Layer w0.381: v2(26.67,21.356) 32.512,21.356 33.02,21.864 U4.13@33.02,22.88
TX1: P12.3 U4.3 | length 55.5
  Bottom Layer w0.381: U4.3@7.62,25.42 8.89,26.69 42.164,26.69 45.72,23.134 45.72,12.466 43.434,10.18 P12.3
TX3: P8.2 U4.10 | length 10.7
  Top Layer w0.381: P8.2 25.4,13.99 U4.10@25.4,22.88
VACUUM: U4.4
VBAT: C3.1 P3.1 P4.1 U1.3 U1.4 U2.1 | length 17.8
  Top Layer w0.635: U1.4 75.426,18.55 80.01,23.134 C3.1 81.398,25.538 83.566,27.706 U2.1
  other v1: 79.248,11.196 80.772,11.196 78.486,12.72 80.01,12.72 81.534,12.72 79.248,14.244 80.772,14.244 75.438,15.768 76.962,15.768 78.486,15.768 80.01,15.768 81.534,15.768 83.058,15.768 84.582,15.768 76.2,17.292 77.724,17.292
VIN: P1.1 U1.1 U1.2
  other v1: 71.628,11.196 70.866,12.72 71.628,14.244 67.818,15.768 69.342,15.768 70.866,15.768 67.056,17.292 68.58,17.292 70.104,17.292 67.818,18.816 69.342,18.816
WS2812_EXT: Q1.2 R4.1 U4.11 | length 8.9
  Top Layer w0.381: U4.11@27.94,22.88 27.94,21.864 30.038,19.766 Q1.2 34.834,19.766 R4.1
WS2812_INT: U4.12 U5.4 | length 26.7
  Top Layer w0.381: U5.4 21.464,47.898 24.13,45.232 24.13,31.77 U4.12@30.48,25.42
XSHUT_A: P7.4 U3.7 | length 25.9
  Top Layer w0.508: P7.4 25.4,59.202 26.67,57.932 43.18,57.932 45.085,56.027 U3.7
XSHUT_B: P9.4 U3.6 | length 9.4
  Top Layer w0.508: P9.4 43.18,59.71 46.355,56.535 U3.6
XSHUT_C: P10.4 U3.5 | length 20
  Top Layer w0.508: U3.5 47.625,56.535 49.022,57.932 59.944,57.932 60.96,58.948 P10.4
XSHUT_D: P14.4 U3.4 | length 36.8
  Top Layer w0.508: U3.4 48.895,56.281 49.53,56.916 77.47,56.916 78.74,58.186 P14.4
pads on no net: P12.5 U2.4 U3.9 U3.10 U3.11 U3.12 U3.13 U4.1 U4.14 U4.15 U4.18 U4.19 U4.20 U4.23 U4.28 U4.29 U4.32 U9.2
copper on no net:
  other v2: 38.1,22.88

## Polygon pours and split planes (outlines as drawn)
GND on Top Layer "Top Layer-GND" (solid, pour order 4): 0.25,0.25 99.75,0.25 99.75,66.75 0.25,66.75
GND on Bottom Layer "Bottom Layer-GND" (solid, pour order 6): 0.25,0.25 99.75,0.25 99.75,66.75 0.25,66.75

## Other copper
Top Layer:
  region net VBAT: 79.736,16.53 86.36,16.53 86.36,10.434 73.152,10.434 73.152,19.578 76.688,19.578
  region net VIN: 72.39,19.578 66.04,19.578 66.04,10.434 72.39,10.434
  region net 5V: 80.01,37.612 80.01,45.994 74.422,45.994 70.358,41.93 70.358,38.882 71.628,37.612 77.216,37.612
  region: 82.042,36.596
  region net NetD1_2: 89.408,45.994 84.836,45.994 84.836,33.421 84.582,33.167 82.55,33.167 82.55,32.151 85.09,32.151 89.408,36.469
Bottom Layer:
  region net VIN: 72.39,19.558 66.04,19.558 66.04,10.414 72.39,10.414
  region net VBAT: 86.36,19.578 86.36,10.434 73.152,10.434 73.152,19.578

## Silkscreen, mask and mechanical layers (free items; w line width, h text height)
Top Overlay:
  text "IR1" at 3.81,56.642 h1.02
  text "IR2" at 87.63,56.388 h1.02
  text "GND" at 66,47.75 h0.81
  text "5V" at 69,47.75 h0.81
  text "Error" at 20.75,45.25 h1.02
  text "OLED" at 53.25,41.25 h1.02
  text "GND" at 48.75,34.5 h1.02 r90
  text "5V" at 51.25,34.5 h1.02 r90
  text "SCL" at 54,34.5 h1.02 r90
  text "SDA" at 56.5,34.5 h1.02 r90
  text "JLCJLCJLCJLC" at 10.668,29.21 h0.81
  text "5V" at 5.5,16.75 h0.81 r90
  text "CH0" at 8,16.75 h0.81 r90
  text "CH1" at 10.5,16.75 h0.81 r90
  text "CH2" at 13,16.75 h0.81 r90
  text "GND" at 15.75,16.75 h0.81 r90
  text "VCC" at 44.25,14.75 h1.02
  text "Sumo 2020" at 51.25,14.25 h1.02
  text "Dec 19" at 51.25,12.5 h1.02
  text "GND" at 44.25,12.25 h1.02
  text "Justin Ong" at 51.25,10.75 h1.02
  text "Receiver" at 3,10.5 h1.02 r90
  text "ODrive" at 18.25,10.25 h1.02 r90
  text "UART" at 19.75,10.25 h1.02 r90
  text "TX" at 44.25,9.75 h1.02
  text "LED" at 34,8.25 h1.02
  text "RX" at 44.25,7.25 h1.02
  text "HC-12" at 40.75,2 h1.02
  text "IR3" at 87.63,1.27 h1.02
  text "IR4" at 4.064,0.508 h1.02
  text "SW1" at 16.5,0.5 h1.02
  text "SW2" at 25.5,0.5 h1.02
Bottom Overlay:
  text "5V" at 2.794,39.37 h0.81 r90
  text "3V3" at 7.874,39.37 h0.81 r90
  text "D23" at 10.414,39.37 h0.81 r90
  text "D15" at 30.734,39.37 h0.81 r90
  text "A14" at 34.036,37.592 h0.81
  text "GND" at 34.036,32.512 h0.81
  text "3V3" at 34.036,29.972 h0.81
  text "GND" at 2.286,28.956 h0.81 r270
  text "D11" at 33.528,28.448 h0.81 r90
  text "D0" at 5.588,28.194 h0.81 r90
  text "3V3" at 40.132,19.304 h1.02 r270
  text "5V" at 42.926,19.304 h1.02 r270
Bottom Solder:
  region: 66.04,9.906 66.04,0.254 86.36,0.254 86.36,9.906
  region: 72.39,19.578 66.04,19.578 66.04,10.434 72.39,10.434
  region: 86.36,19.578 86.36,10.434 73.152,10.434 73.152,19.578
Mechanical 15:
  the board outline again, w0.152